# Altium PCB PCB1.PcbDoc
Units mm, origin at the board's own origin, x right, y up, seen from the top; angles counter-clockwise.
Board outline 152.4 x 101.6 mm, 2 copper layers (Top Layer, Bottom Layer); 8 components, 10 nets, 29 pads, 0 vias.
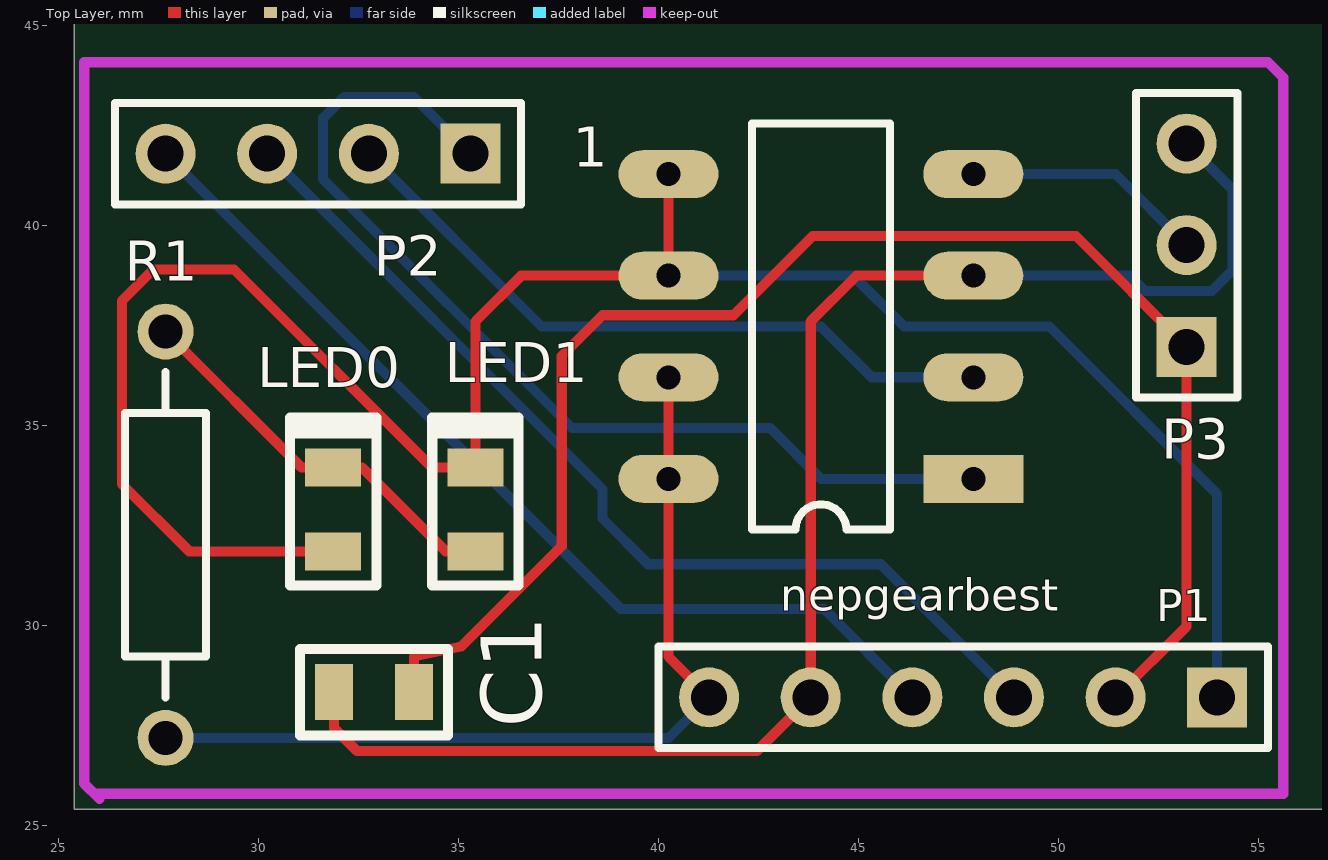
[diagram p0: Top Layer view]
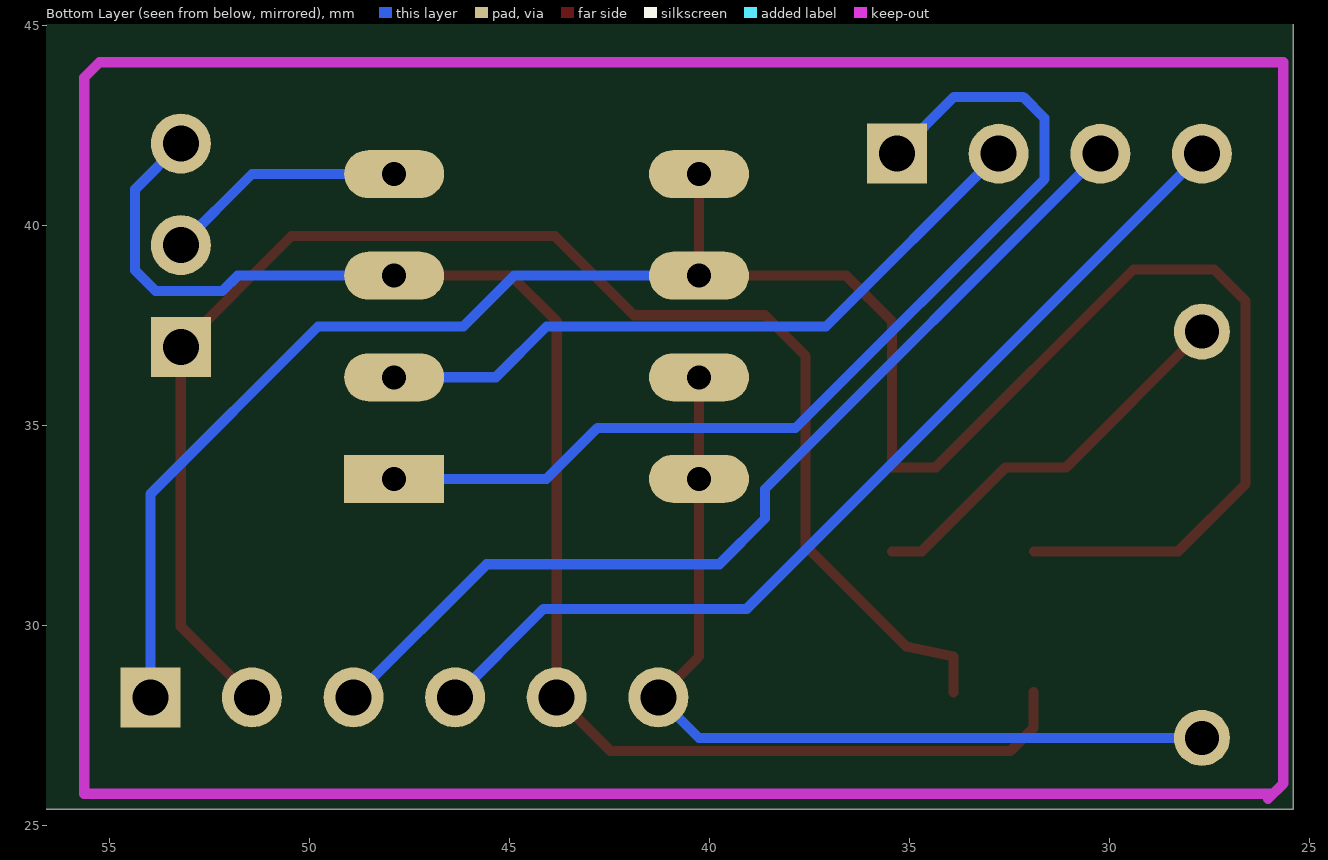
[diagram p1: Bottom Layer view, seen from below]

## Layer stack, top to bottom
Top Solder: solder mask 0.0102, Solder Resist, Dk 3.5
Top Layer: signal copper 0.0356
Dielectric 1: dielectric 0.32, FR-4, Dk 4.8
Bottom Layer: signal copper 0.0356
Bottom Solder: solder mask 0.0102, Solder Resist, Dk 3.5

## Board outline
25.4,25.4 177.8,25.4 177.8,127 25.4,127

## Design rules (kind name [scope] priority, off if disabled: settings)
Clearance [All] p1: gap=0.254
PolygonConnect [All] p1: connectstyle=Relief reliefconductorwidth=0.254 reliefentries=4 polygonreliefangle="90 Angle" airgapwidth=0.254
RoutingVias [All] p1: holewidth=0.711 width=1.27 viastyle="Through Hole" minholewidth=0.711 minwidth=1.27 maxholewidth=0.711 maxwidth=1.27
SolderMaskExpansion [All] p1: expansion=0.102
UnpouredPolygon [All] p1: allowunpoured=FALSE
Width [All] p1: maxlimit=0.254 minlimit=0.254 preferedwidth=0.254
29 further rules are at their usual default settings.

## Components (designator, comment, footprint, x,y, rotation, side; value= is the part's Value field where it differs from the comment)
1 "RZ7886" "RZ7886 - duplicate" 47.879,33.655 r180 top
C1 "Cap" 0805 32.893,28.321 r180 top
LED0 "LED" LED-0805 31.877,32.893 r90 top
LED1 "LED" LED-0805 35.433,32.893 r90 top
P1 "Header 6" HDR1X6 53.975,28.194 r180 top
P2 "Header 4" HDR1X4 35.306,41.783 r180 top
P3 "Header 3" HDR1X3 53.213,36.957 r90 top
R1 "Res2" AXIAL-0.4 27.686,32.258 r90 top

## Footprints (in the part's own frame and the unit in brackets; to place one, negate y for a bottom-side part, rotate by r counter-clockwise, add the part's x,y. Pads: shape width x height; smd on the part's side, far side on the other; paste and mask are expansions set on the pad)
0805 [mm] "SMD, 0805"
  rect 0.95x1.4 smd: 1(-1,0) 2(1,0)
  silkscreen extent -1.85,-1.08 1.85,1.08, body extent -1,-0.62 1,0.63, height 0.45
AXIAL-0.4 [mm] "Axial Device, Thru-Hole; 2 Leads; 0.4 in Pin Spacing"
  round 1.4 hole 0.85: 1(-5.08,0) 2(5.08,0)
  silkscreen extent -4.06,-1.02 4.06,1.02
HDR1X3 [mm] "Connector; Header; 3 Position"
  rect 1.5x1.5 hole 0.9: 1(0,0)
  round 1.5 hole 0.9: 2(2.54,0) 3(5.08,0)
  silkscreen extent -1.27,-1.27 6.35,1.27
HDR1X4 [mm] "Connector; Header; 4 Position"
  rect 1.5x1.5 hole 0.9: 1(0,0)
  round 1.5 hole 0.9: 2(2.54,0) 3(5.08,0) 4(7.62,0)
  silkscreen extent -1.27,-1.27 8.89,1.27
HDR1X6 [mm] "Connector; Header; 6 Position"
  rect 1.5x1.5 hole 0.9: 1(0,0)
  round 1.5 hole 0.9: 2(2.54,0) 3(5.08,0) 4(7.62,0) 5(10.16,0) 6(12.7,0)
  silkscreen extent -1.27,-1.27 13.97,1.27
LED-0805 [mm] "LED, SMD, 0805"
  rect 0.95x1.4 smd: 1(-1.05,0) 2(1.05,0)
  silkscreen extent -1.9,-1.08 2.3,1.08, body extent -1.03,-0.46 1.03,0.45, height 0.85
"RZ7886 - duplicate" [mm]
  rect 2.5x1.2 hole 0.6: 1(0,0)
  oval 2.5x1.2 hole 0.6: 2(0,-2.54) 3(0,-5.08) 4(0,-7.62) 5(7.62,-7.62) 6(7.62,-5.08) 7(7.62,-2.54) 8(7.62,0)
  silkscreen extent 2.08,-8.89 5.54,1.27

## Part data
C1: library part CAP, "Capacitor"
P1: "Header, 6-Pin"
P2: "Header, 4-Pin"
P3: "Header, 3-Pin"
R1: "Resistor"

## Nets (pads, with @x,y where several pads share a name; then routed paths per layer and width w, separated by ;. In a path a pad name is that pad's centre, name@x,y a point inside that pad or via, vN(x,y) a via of type N, cw(c..) or ccw(c..) an arc to the next point about the centre after c; other vN are vias at no path point)
5V: C1.1 P1.2 P3.1 | length 37.9
  Top Layer w0.254: C1.1 33.893,29.21 35.077,29.464 37.592,31.979 37.592,36.728 38.608,37.744 41.885,37.744 43.866,39.726 50.444,39.726 P3.1 53.213,29.972 P1.2
GND: 1.3 C1.2 P1.5 P3.3 | length 38
  Top Layer w0.254: C1.2 31.893,27.432 32.477,26.848 42.469,26.848 P1.5 43.815,37.592 44.958,38.735 1.3
  Bottom Layer w0.254: 1.3 51.791,38.735 52.172,38.354 53.848,38.354 54.356,38.862 54.356,40.894 P3.3
NetLED0_2: LED0.2 LED1.1 R1.2 | length 10
  Top Layer w0.254: R1.2 31.081,33.943 LED0.2 32.588,33.943 34.688,31.843 LED1.1
O1: 1.5 1.6 LED0.1 LED1.2 P1.1 | length 54.3
  Top Layer w0.254: LED0.1 28.279,31.843 26.594,33.528 26.594,38.1 27.381,38.887 29.396,38.887 34.341,33.943 LED1.2 35.433,37.592 36.576,38.735 1.6 1.5
  Bottom Layer w0.254: 1.6 44.882,38.735 46.152,37.465 49.784,37.465 53.975,33.274 P1.1
O2: 1.7 1.8 P1.6 R1.1 | length 22.4
  Top Layer w0.254: 1.7 1.8 40.259,29.21 P1.6
  Bottom Layer w0.254: R1.1 40.259,27.178 P1.6
PA6: P1.4 P2.4 | length 24.3
  Bottom Layer w0.254: P2.4 39.065,30.404 44.145,30.404 P1.4
PA7: P1.3 P2.3 | length 24.7
  Bottom Layer w0.254: P2.3 38.608,33.401 38.608,32.664 39.751,31.521 45.568,31.521 P1.3
PB8: 1.1 P2.1 | length 25.4
  Bottom Layer w0.254: P2.1 33.884,43.205 32.156,43.205 31.623,42.672 31.623,41.148 37.846,34.925 42.799,34.925 44.069,33.655 1.1
PB9: 1.2 P2.2 | length 17.4
  Bottom Layer w0.254: P2.2 37.084,37.465 44.069,37.465 45.339,36.195 1.2
PWR: 1.4 P3.2 | length 6.1
  Bottom Layer w0.254: 1.4 51.435,41.275 P3.2

## Keep-outs
Keep-Out Layer:
  lines w0.254: 25.908,25.781 55.626,25.781 55.626,27.305 55.626,43.688 55.245,44.069 25.654,44.069 25.654,26.035 26.035,25.654

## Silkscreen, mask and mechanical layers (free items; w line width, h text height)
Top Overlay:
  text "nepgearbest" at 43.053,30.353 h0.8